# Altium PCB Booster_USER_IFC_ENC424J600.PcbDoc (part 2 of 2)
Units mm, origin at the board's own origin, x right, y up, seen from the top; angles counter-clockwise.
Board outline 78 x 45 mm, 2 copper layers (Top Layer, Bottom Layer), stack 1.571 mm thick; 90 components, 92 nets, 349 pads, 172 vias.
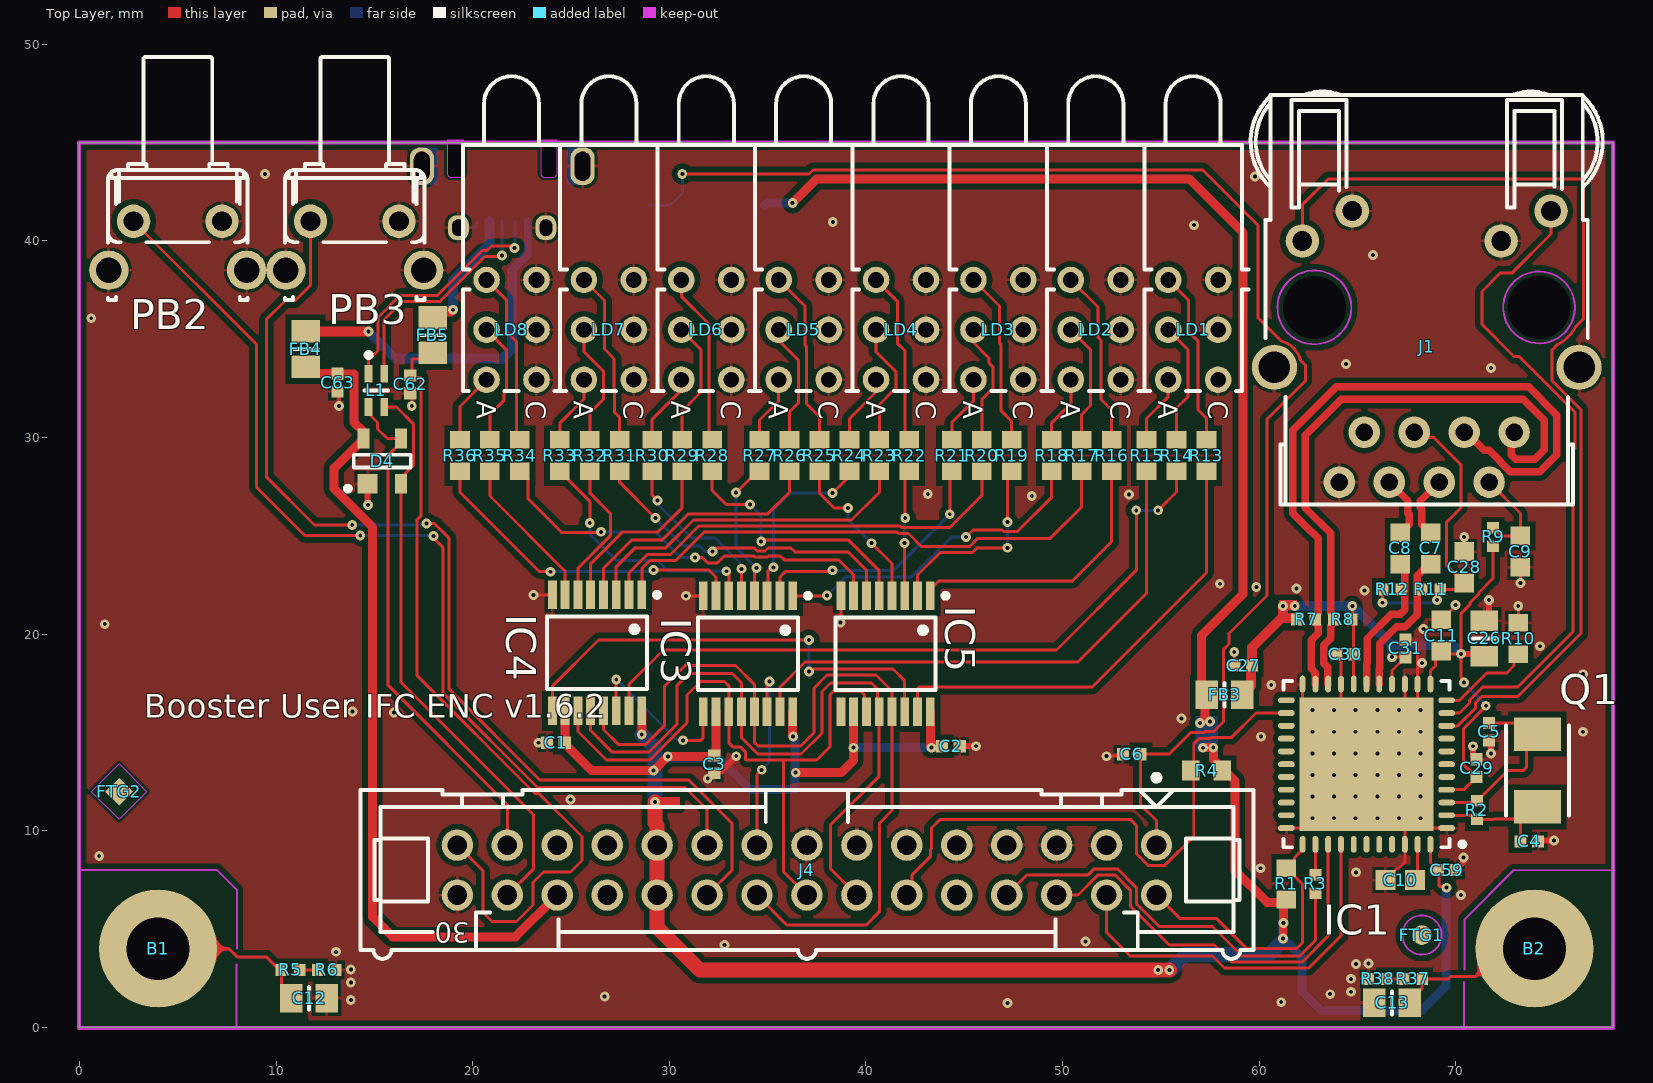
[diagram p0: Top Layer view]

## Via types
v1: diameter 0.5, hole 0.2, Top Layer to Bottom Layer, tented both sides, 136 vias
v2: diameter 0.5, hole 0.2, Top Layer to Bottom Layer, 36 vias

## Nets (pads, with @x,y where several pads share a name; then routed paths per layer and width w, separated by ;. In a path a pad name is that pad's centre, name@x,y a point inside that pad or via, vN(x,y) a via of type N, cw(c..) or ccw(c..) an arc to the next point about the centre after c; other vN are vias at no path point) (continued)
NetLD6_2: (continued)
  Top Layer w0.152: LD6.2 30.61,37.19 32.022,35.778 32.022,30.037 R28.2
NetLD6_4: LD6.4 R29.2 | length 6.4
  Top Layer w0.152: LD6.4 31.615,34.473 31.615,32.315 30.653,31.353 R29.2
NetLD6_6: LD6.6 R30.2 | length 3.7
  Top Layer w0.152: R30.2 29.129,30.929 30.61,32.41 LD6.6
NetLD7_2: LD7.2 R31.2 | length 8.9
  Top Layer w0.152: LD7.2 26.7,36.975 26.7,34.5 27.192,34.008 27.192,32.513 27.2,32.505 27.2,31.3 27.478,31.022 R31.2
NetLD7_4: LD7.4 R32.2 | length 6.3
  Top Layer w0.152: LD7.4 25.657,34.36 26.662,33.354 26.662,31.962 25.954,31.254 R32.2
NetLD7_6: LD7.6 R33.2 | length 3.6
  Top Layer w0.152: R33.2 24.43,30.73 25.657,31.957 LD7.6
NetLD8_2: LD8.2 R34.2 | length 8.9
  Top Layer w0.152: LD8.2 21.709,37.013 21.709,35.391 22.239,34.861 22.239,29.882 R34.2
NetLD8_4: LD8.4 R35.2 | length 6.4
  Top Layer w0.152: LD8.4 21.709,34.473 21.709,32.412 21.6,32.303 21.6,31.9 20.874,31.174 R35.2
NetLD8_6: LD8.6 R36.2 | length 3.6
  Top Layer w0.152: R36.2 19.35,31.584 LD8.6
NetR5_2: R5.2 R6.1 | length 0.9
  Top Layer w0.152: R5.2 R6.1
NetR37_2: R37.2 R38.1 | length 0.9
  Top Layer w0.152: R38.1 R37.2
P3V3: C1.1 C2.1 C3.1 C59.1 FB3.1 IC1.44 IC3.10 IC3.16 IC4.10 IC4.16 IC5.10 IC5.16 J4.21 J4.22 R1.2 R4.2 SW1.2 | length 167.1
  Top Layer w0.152: IC1.44 68.713,8.375 C59.1 69.16,7.928 69.16,7.194 69.183,7.171 69.471,7.171 v1(69.538,7.104)
  Top Layer w0.457: IC4.10 24.7,14.4 26.043,13.057 v1(29.204,13.057) v1(29.925,13.778) 32.375,13.778 IC3.10 ; v1(28.6,14.9) IC4.16 ; IC3.16 36.275,14.825 v1(36.3,14.8) ; v1(36.275,41.935) 37.494,43.155 56.443,43.155 59.186,40.411 59.186,22.047 57.069,19.93 57.069,17.185 FB3.1 57.247,16.817 57.247,15.75 56.995,15.499 v1(56.995,15.487) ; v1(36.427,12.954) 38.739,12.954 39.375,13.59 v1(39.375,14.225) IC5.10 ; IC5.16 43.275,14.325 43.852,14.325 C2.1 43.81,14.233 43.345,14.233 v1(43.337,14.225) ; v1@57.154,14.225 v1(57.668,14.225) ; v1(57.668,14.225) 57.668,13.643 58.786,12.526 58.786,7.975 60.405,6.356 R1.2@61.243,6.356 ; v1@61.243,5.283 R1.2@61.243,6.356 ; R1.2 R1.2@61.243,6.356
  Top Layer w0.762: v1(29.265,11.455) 29.265,10.389 29.38,10.273 J4.21 J4.22 29.38,5.092 31.551,2.921 v1(54.868,2.921) v1(55.433,2.921)
  Bottom Layer w0.457: 29.265,13.7 32.5,13.7 34.1,12.1 36.4,12.1 36.4,14.7 v1(36.3,14.8) ; SW1.2 34.958,41.935 v1(36.275,41.935) ; v1(39.375,14.225) v1(43.337,14.225) ; v1(56.995,15.487) 57.154,15.329 v1(57.154,14.224) ; v1@61.2,4.4 61.218,4.418 v1(61.218,4.521) ; v1@61.2,5.32 61.21,5.311 61.21,4.529 v1(61.218,4.521) ; v1@69.5,7.104 69.5,2.085 68.279,0.864 63.136,0.864 62.19,1.81 62.19,3.549 v1(61.218,4.521)
  Bottom Layer w0.762: v1(28.6,14.9) 29.265,14.235 29.265,13.7 v1(29.265,11.455) ; v1(54.868,2.921) v1(55.433,2.921) 55.494,2.921 56.273,3.7 60.5,3.7 v1@61.2,4.4
  other v1: 61.241,5.307 57.5,15.563
P3V3A: C11.1 C26.1 C27.1 C29.1 C30.1 C31.1 FB3.2 IC1.4 IC1.12 IC1.15 IC1.18 R7.2 R8.2 R9.1 | length 42.6
  Top Layer w0.152: v1(64.74,21.425) 64.74,20.767 R8.2 64.813,20.665 IC1.18 ; IC1.15 66.763,18.15 C31.1 v1(66.763,18.829) ; IC1.12 68.713,18.14 68.978,18.405 68.978,18.74 69.239,19.001 v1(70.26,19.001) ; IC1.4 70.414,12.087 C29.1 70.702,13.099 70.659,13.099 70.398,13.36 70.398,15.194 71.53,16.327 v1(71.53,16.358) ; v1(70.43,17.549) 70.43,17.643 70.26,17.812 v1(70.26,19.001) ; R9.1 71.898,22.839 71.179,22.12 71.179,22.051 70.718,21.59 70.718,21.493 70.26,21.035 v1(70.26,19.001)
  Top Layer w0.305: v1(70.26,19.001) 71.334,19.001 C26.1
  Top Layer w0.508: FB3.2@59.186,17.037 59.259,17.037 59.58,17.358 59.58,18.349 C27.1 59.636,19.319 61.133,20.817 ; v1(61.218,21.425) 61.218,20.901 61.133,20.817 ; R7.2@61.915,20.817 61.133,20.817
  Bottom Layer w0.152: v1(70.43,17.549) 70.43,17.503 71.53,16.403 v1(71.53,16.358)
  Bottom Layer w0.508: v1(61.218,21.425) v1(61.811,21.425) 64.776,21.425 66.763,19.439 ; v1(66.763,18.829) 66.763,19.439 ; v1(70.26,19.001) 69.822,19.439 66.763,19.439
RJ45_GRN: IC1.10 J1.D1 | length 33.6
  Top Layer w0.152: IC1.10 70.191,15.987 70.698,16.494 70.698,16.634 71.365,17.3 73.143,17.3 73.856,18.013 75.967,20.124 75.967,29.354 76.058,29.445 76.058,31.299 73.235,34.123 72.97,34.123 71.334,35.759 71.334,37.434 72.279,38.379 72.876,38.379 74.85,40.353 J1.D1
RJ45_RX_C_N: C8.2 J1.6 | length 3.2
  Top Layer w0.381: J1.6 67.572,26.778 67.572,26.159 67.638,26.094 67.638,25.596 67.2,25.158 C8.2
RJ45_RX_C_P: C7.2 J1.4 | length 3.2
  Top Layer w0.381: C7.2 68.711,25.158 68.273,25.596 68.273,26.357 68.207,26.422 68.207,26.778 J1.4
RJ45_RX_N: C8.1 IC1.17 R12.2 | length 7.3
  Top Layer w0.381: IC1.17 65.47,17.47 65.47,18.503 65.488,18.522 65.488,19.779 66.726,21.016 67.175,21.016 67.398,21.24 67.398,22.275 67.398,23.334 C8.1
RJ45_RX_P: C7.1 IC1.16 R11.2 | length 7.5
  Top Layer w0.381: IC1.16 66.105,17.47 66.105,18.24 66.123,18.259 66.123,19.516 66.989,20.381 67.438,20.381 68.033,20.977 68.033,22.966 68.34,23.273 68.452,23.273 C7.1
RJ45_TX_N: IC1.21 J1.3 R7.1 | length 36.7
  Top Layer w0.381: IC1.21 62.863,18.044 62.648,18.259 62.648,19.689 63.003,20.044 63.003,20.409 62.954,20.458 62.954,20.652 R7.1 62.954,20.851 62.954,21.046 63.003,21.094 63.003,24.867 62.35,25.52 61.715,26.155 61.715,30.378 63.915,32.578 73.704,32.578 75.137,31.145 75.137,29.117 74.284,28.263 72.783,28.263 71.703,29.343 71.443,29.343 70.516,30.27 J1.3
RJ45_TX_P: IC1.20 J1.1 R8.1 | length 31.6
  Top Layer w0.381: IC1.20 63.498,17.477 63.498,18.307 63.283,18.522 63.283,19.426 63.638,19.781 63.638,20.409 63.686,20.458 63.686,20.652 R8.1 63.686,20.851 63.686,21.046 63.638,21.094 63.638,25.13 62.35,26.418 62.35,30.115 64.178,31.943 73.441,31.943 74.502,30.882 74.502,29.38 74.021,28.898 73.046,28.898 72.823,29.122 72.823,30.123 J1.1
RJ45_YEL: IC1.9 J1.D3 | length 50.1
  Top Layer w0.152: J1.D3 62.2,41.842 63.513,43.155 76.509,43.155 76.509,36.059 76.115,35.666 cw(c74.24,36.62) 75.194,34.745 74.893,34.444 74.893,32.896 76.363,31.426 76.363,20.031 73.169,16.836 71.332,16.836 71.003,16.507 71.003,16.231 70.11,15.337 IC1.9
SPI1_MISO: J4.8 R3.1 | length 21.3
  Top Layer w0.152: J4.8 48.189,7.759 51.307,7.759 51.612,8.063 52.792,8.063 53.751,7.104 53.751,6.304 54.924,5.131 57.632,5.131 59.131,3.632 62.064,3.632 62.863,4.431 R3.1
SPI1_MOSI: IC1.36 J4.6 | length 21.8
  Top Layer w0.152: J4.6 50.785,6.73 51.814,7.759 52.666,7.759 53.447,6.978 53.447,6.178 55.433,4.191 57.735,4.191 58.598,3.327 62.19,3.327 63.498,4.635 63.498,5.512 63.513,5.527 IC1.36
SPI1_NSS: IC1.34 J4.2 R1.1 | length 14.4
  Top Layer w0.152: J4.2 55.983,5.527 57.846,5.527 59.372,4 61.897,4 62.205,4.307 62.205,7.283 61.811,7.676 61.811,7.726 R1.1@61.438,8.1 ; R1.1 R1.1@61.438,8.1 ; IC1.34 62.213,9.037 61.811,8.636 61.811,8.474 R1.1@61.438,8.1
SPI1_SCK: IC1.37 J4.4 | length 19.9
  Top Layer w0.152: J4.4 52.24,4.835 53.443,3.632 57.632,3.632 58.242,3.023 62.527,3.023 64.163,4.658 IC1.37
pads on no net: FTG1.FTG2 FTG2.1 FTG3.FTG2 FTG4.1 IC1.5 IC1.6 IC1.7 IC1.8 IC1.23 IC1.25 IC1.26 IC1.27 IC1.28 IC1.29 IC1.30 IC1.31 IC1.32 IC1.38 IC1.39 IC1.40 IC1.41 IC5.9 J1.7 J1.M1 J1.M2 J2.PastePad J4.10 J4.23 J4.24

## Polygon pours and split planes (outlines as drawn)
GND on Bottom Layer "Top-No Net" (solid, remove dead copper, pour order 0): 0.33,44 77,44 77,1 0.33,1
GND on Top Layer "GND_L01_P001" (solid, remove dead copper, pour order 1): 0.004,44.983 77.931,44.983 77.931,0.229 77.906,0.203 0.258,0.203 0.156,0.305

## Keep-outs
Bottom Layer:
  lines w0.1: 7.979,3.175 7.979,4.191
Keep-Out Layer:
  lines w0.1: 0,8 7,8 8,7 8,4 ; 7.979,0.071 7.979,3.2 ; 64.686,36.59 cw(c62.81,36.62) 64.686,36.641 ; 70.423,-0.025 70.423,2.301 ; 70.441,2.939 70.441,5.484 72.935,7.978 78,8 ; 76.065,36.59 cw(c74.24,36.62) 76.065,36.642
  lines w0.2: -0.025,-0.025 -0.025,45.009 78,45.009 78,-0.025 -0.025,-0.025

## Other copper
Top Layer:
  rectangle net P3V3A: 61.015,21.24 61.915,21.733
  rectangle net P3V3: 61.015,4.293 61.446,5.512
  rectangle net P3V3: 53.445,2.667 55.071,3.226
  rectangle net P3V3: 29.011,11.176 30.535,11.709
Bottom Layer:
  rectangle net P3V3: 56.773,14.037 57.915,15.85

## Silkscreen, mask and mechanical layers (free items; w line width, h text height)
Top Overlay:
  text "Booster User IFC ENC v1.6.2" at 3.306,15.748 h1.2
Mechanical 1:
  drawing of 198 lines, arcs and shapes, not listed
  text "Layer" at -6.337,-8.661 h1.52
  text "Name" at 4.074,-8.661 h1.52
  text "Material" at 27.69,-8.661 h1.52
  text "Thickness" at 49.528,-8.661 h1.52
  text "Constant" at 66.034,-8.661 h1.52
  text "Board Layer Stack" at 80.508,-8.661 h1.52
  text "Top Overlay" at 4.074,-11.709 h1.52
  text "Top Solder" at 4.074,-14.757 h1.52
  text "Solder Resist" at 27.69,-14.757 h1.52
  text "0.010mm" at 49.528,-14.757 h1.52
  text "3.5" at 66.034,-14.757 h1.52
  text "1" at -6.337,-17.805 h1.52
  text "Top Layer" at 4.074,-17.805 h1.52
  text "0.036mm" at 49.528,-17.805 h1.52
  text "Dielectric 1" at 4.074,-20.853 h1.52
  text "FR-4" at 27.69,-20.853 h1.52
  text "1.500mm" at 49.528,-20.853 h1.52
  text "4.8" at 66.034,-20.853 h1.52
  text "2" at -6.337,-23.901 h1.52
  text "Bottom Layer" at 4.074,-23.901 h1.52
  text "0.036mm" at 49.528,-23.901 h1.52
  text "Bottom Solder" at 4.074,-26.949 h1.52
  text "Solder Resist" at 27.69,-26.949 h1.52
  text "0.010mm" at 49.528,-26.949 h1.52
  text "3.5" at 66.034,-26.949 h1.52
  text "Bottom Overlay" at 4.074,-29.997 h1.52

## Text inside footprints (layer, text, board x,y; h text height)
J2: Drill Drawing "0.85" at 19.998,47.916 h1 r180; Drill Drawing "1.87" at 21.141,45.311 h1 r90; Drill Drawing "r0.2" at 23.8,42.3 h1 r180; Mechanical 8 "PCB end" at 17.2,46.075 h0.5 r180
J4: Top Overlay "30" at 19.855,5.333 h1.02 r180; Mechanical 14 "30" at 19.855,5.333 h1.02 r180
LD1: Top Overlay "A" at 54.867,31.873 h1 r270; Top Overlay "C" at 57.407,31.873 h1 r270; Mechanical 14 "A" at 54.845,31.878 h1 r270; Mechanical 14 "C" at 57.445,31.878 h1 r270
LD2: Top Overlay "A" at 49.914,31.873 h1 r270; Top Overlay "C" at 52.454,31.873 h1 r270; Mechanical 14 "A" at 49.892,31.878 h1 r270; Mechanical 14 "C" at 52.492,31.878 h1 r270
LD3: Top Overlay "A" at 44.961,31.873 h1 r270; Top Overlay "C" at 47.501,31.873 h1 r270; Mechanical 14 "A" at 44.939,31.878 h1 r270; Mechanical 14 "C" at 47.539,31.878 h1 r270
LD4: Top Overlay "A" at 40.008,31.873 h1 r270; Top Overlay "C" at 42.548,31.873 h1 r270; Mechanical 14 "A" at 39.986,31.878 h1 r270; Mechanical 14 "C" at 42.586,31.878 h1 r270
LD5: Top Overlay "A" at 35.055,31.873 h1 r270; Top Overlay "C" at 37.595,31.873 h1 r270; Mechanical 14 "A" at 35.033,31.878 h1 r270; Mechanical 14 "C" at 37.633,31.878 h1 r270
LD6: Top Overlay "A" at 30.102,31.873 h1 r270; Top Overlay "C" at 32.642,31.873 h1 r270; Mechanical 14 "A" at 30.08,31.878 h1 r270; Mechanical 14 "C" at 32.68,31.878 h1 r270
LD7: Top Overlay "A" at 25.149,31.873 h1 r270; Top Overlay "C" at 27.689,31.873 h1 r270; Mechanical 14 "A" at 25.127,31.878 h1 r270; Mechanical 14 "C" at 27.727,31.878 h1 r270
LD8: Top Overlay "A" at 20.196,31.873 h1 r270; Top Overlay "C" at 22.736,31.873 h1 r270; Mechanical 14 "A" at 20.174,31.878 h1 r270; Mechanical 14 "C" at 22.774,31.878 h1 r270